# Altium PCB CPU_PCB1.PcbDoc
Units mil, origin at the board's own origin, x right, y up, seen from the top; angles counter-clockwise.
Board outline 1980 x 1520 mil, 2 copper layers (Top Layer, Bottom Layer); 13 components, 48 nets, 113 pads, 0 vias.
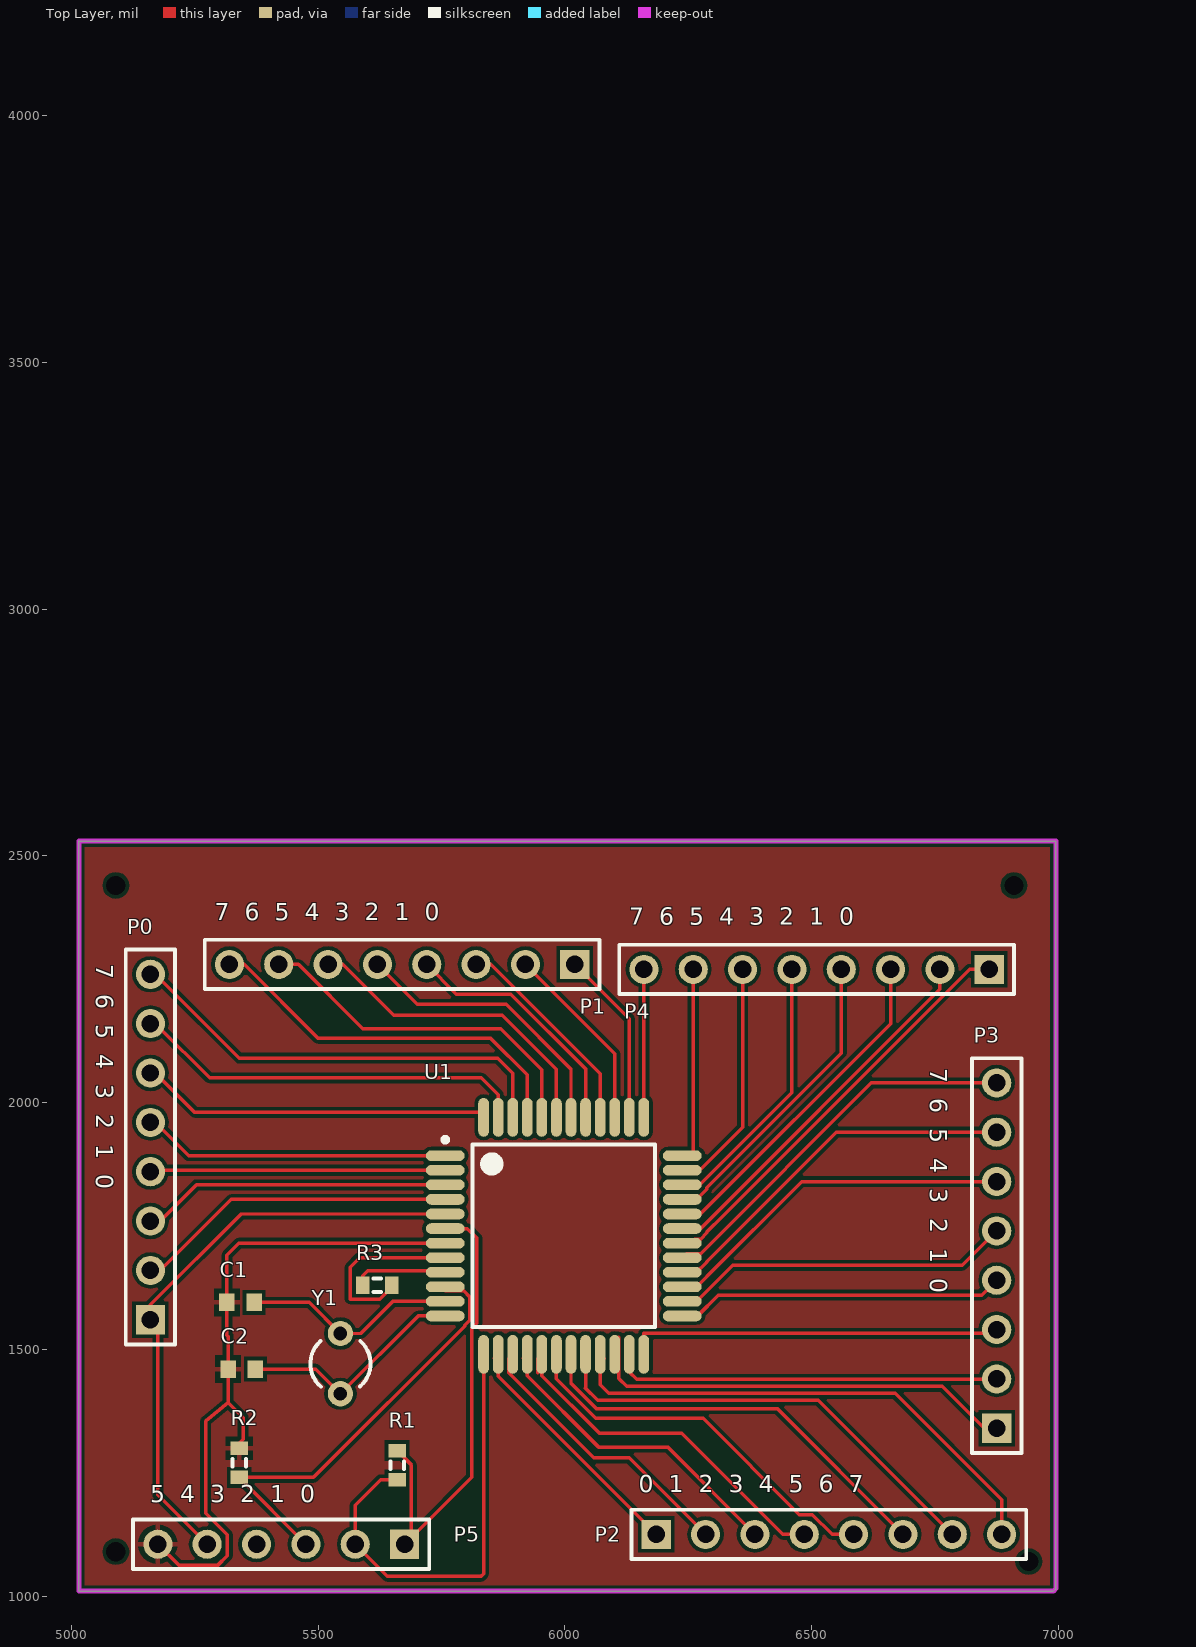
[diagram p0: Top Layer view]
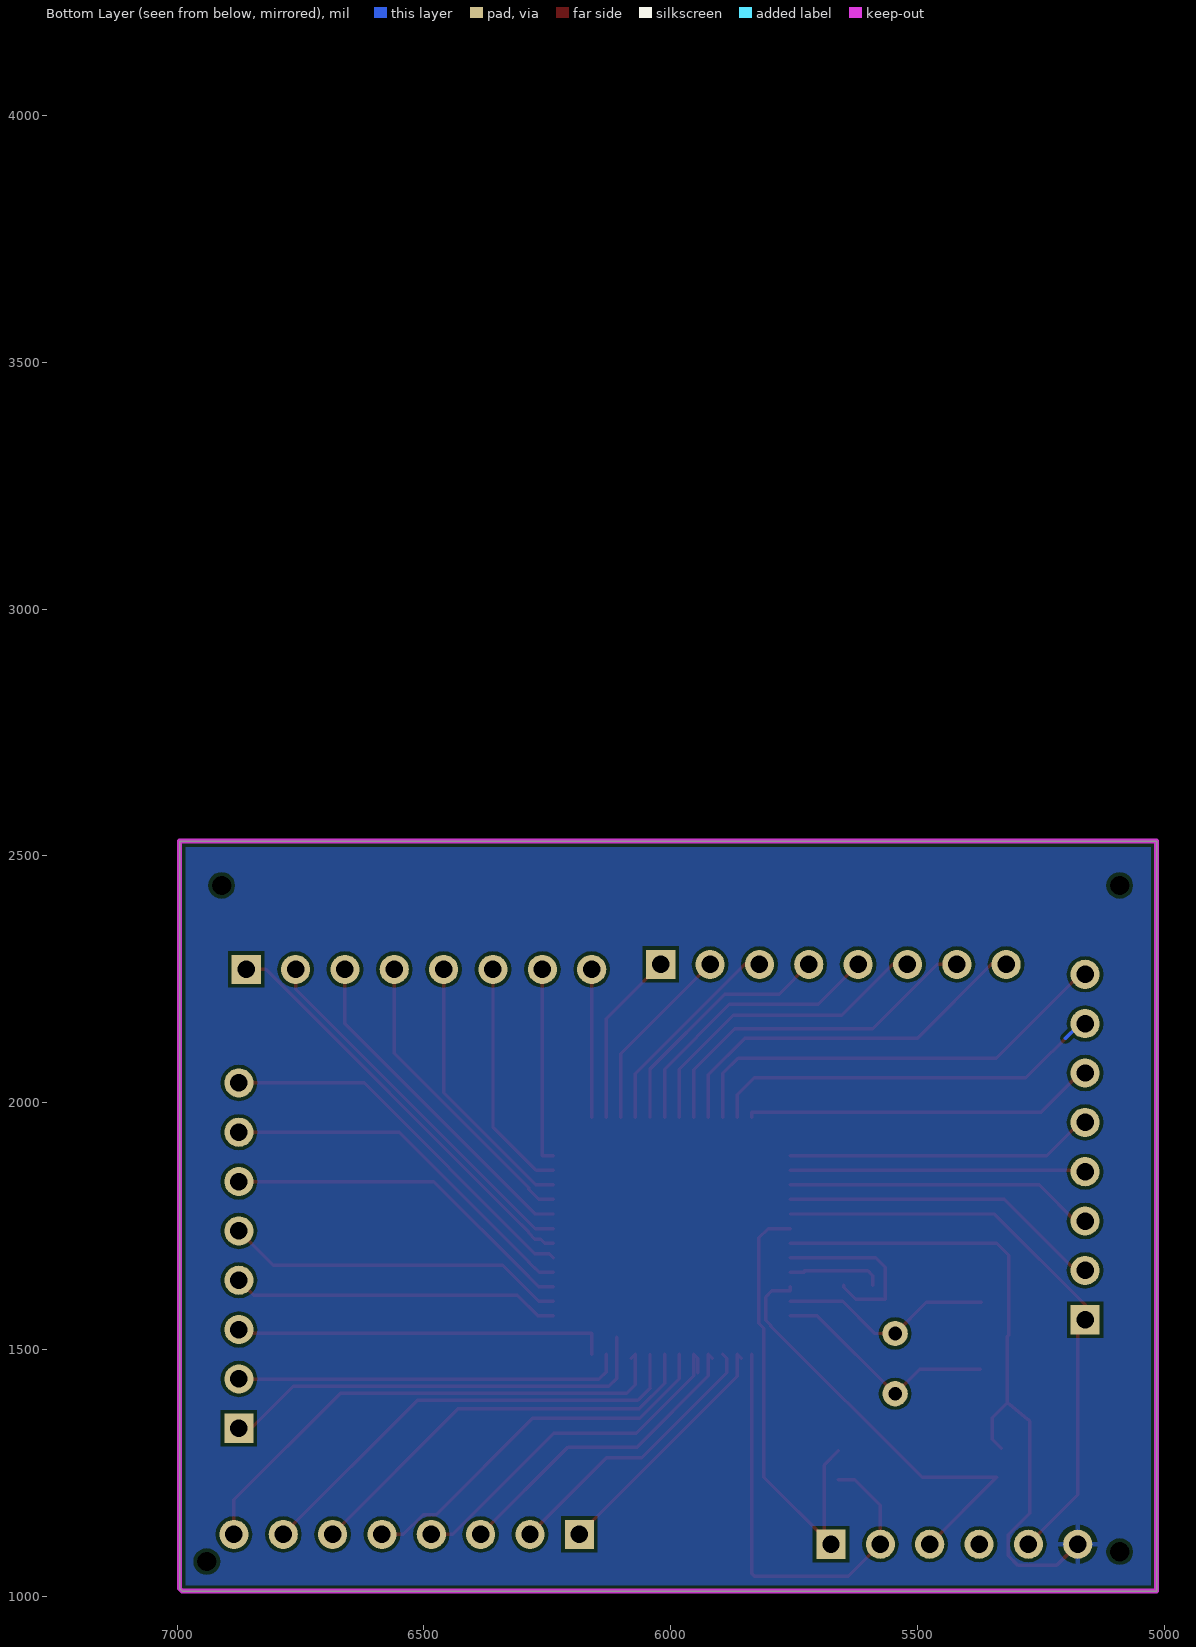
[diagram p1: Bottom Layer view, seen from below]

## Layer stack, top to bottom
Top Solder: solder mask 0.4, Solder Resist, Dk 3.5
Top Layer: signal copper 1.4
Dielectric 1: dielectric 12.6, FR-4, Dk 4.8
Bottom Layer: signal copper 1.4
Bottom Solder: solder mask 0.4, Solder Resist, Dk 3.5

## Board outline
5015,1010 5015,2530 6995,2530 6995,1015 6990,1010

## Design rules (kind name [scope] priority, off if disabled: settings)
Clearance [All] p1: gap=7
PolygonConnect [All] p1: connectstyle=Relief reliefconductorwidth=10 reliefentries=4 polygonreliefangle="90 Angle" airgapwidth=10
RoutingVias [All] p1: holewidth=7.87 width=19.68 viastyle="Through Hole" minholewidth=7.87 minwidth=19.68 maxholewidth=7.87 maxwidth=19.68
SolderMaskExpansion [All] p1: expansion=4
Width [All] p1: maxlimit=20 minlimit=6 preferedwidth=7
30 further rules are at their usual default settings.

## Components (designator, comment, footprint, x,y, rotation, side; value= is the part's Value field where it differs from the comment)
C1 "Cap Semi" 1608[0603] 5342.56,1595 r0 top
C2 "Cap Semi" 1608[0603] 5345,1460 r0 top
P0 "Header 8" HDR1X8 5160,1560 r90 top
P1 "Header 8" HDR1X8 6020,2280 r180 top
P2 "Header 8" HDR1X8 6185,1125 r0 top
P3 "Header 8" HDR1X8 6875,1340 r90 top
P4 "Header 8" HDR1X8 6860,2270 r180 top
P5 "Header 6" HDR1X6 5675,1105 r180 top
R1 "Res3" J1-0603 5660,1265 r90 top
R2 "Res3" J1-0603 5340,1270 r270 top
R3 "Res3" J1-0603 5619.53,1630 r0 top
U1 "S3F8S19" QFP75P1335X1335X230-48N 5997.56,1730 r0 top
Y1 "XTAL" R38 5545,1471.02 r0 top

## Footprints (in the part's own frame and the unit in brackets; to place one, negate y for a bottom-side part, rotate by r counter-clockwise, add the part's x,y. Pads: shape width x height; smd on the part's side, far side on the other; paste and mask are expansions set on the pad)
1608[0603] [mm] "Chip Capacitor, Body 1.6x0.8mm, IPC High Density"
  rect 0.8x0.9 smd: 1(-0.7,0) 2(0.7,0)
  body extent -0.87,-0.48 0.87,0.48, height 1.3
HDR1X6 [mm] "Connector; Header; 6 Position"
  rect 1.5x1.5 hole 0.9: 1(0,0)
  round 1.5 hole 0.9: 2(2.54,0) 3(5.08,0) 4(7.62,0) 5(10.16,0) 6(12.7,0)
  silkscreen extent -1.27,-1.27 13.97,1.27
HDR1X8 [mm] "Connector; Header; 8 Position"
  rect 1.5x1.5 hole 0.9: 1(0,0)
  round 1.5 hole 0.9: 2(2.54,0) 3(5.08,0) 4(7.62,0) 5(10.16,0) 6(12.7,0) 7(15.24,0) 8(17.78,0)
  silkscreen extent -1.27,-1.27 19.05,1.27
J1-0603 [mm] "Chip Resistor, Body 1.6x0.8mm, IPC High Density"
  rect 0.7x0.9 smd: 1(-0.75,0) 2(0.75,0)
  silkscreen extent -0.2,-0.35 0.2,0.35, body extent -0.85,-0.48 0.85,0.48, height 0.9
QFP75P1335X1335X230-48N [mm] "QFP, 48-Leads, Body 10.00x10.00mm, Pitch 0.75mm, IPC Medium Density"
  oval 2x0.55 smd: 1(-6.1,4.125) 2(-6.1,3.375) 3(-6.1,2.625) 4(-6.1,1.875) 5(-6.1,1.125) 6(-6.1,0.375) 7(-6.1,-0.375) 8(-6.1,-1.125) 9(-6.1,-1.875) 10(-6.1,-2.625) 11(-6.1,-3.375) 12(-6.1,-4.125) 25(6.1,-4.125) 26(6.1,-3.375) 27(6.1,-2.625) 28(6.1,-1.875) 29(6.1,-1.125) 30(6.1,-0.375) 31(6.1,0.375) 32(6.1,1.125) 33(6.1,1.875) 34(6.1,2.625) 35(6.1,3.375) 36(6.1,4.125)
  oval 0.55x2 smd: 13(-4.125,-6.1) 14(-3.375,-6.1) 15(-2.625,-6.1) 16(-1.875,-6.1) 17(-1.125,-6.1) 18(-0.375,-6.1) 19(0.375,-6.1) 20(1.125,-6.1) 21(1.875,-6.1) 22(2.625,-6.1) 23(3.375,-6.1) 24(4.125,-6.1) 37(4.125,6.1) 38(3.375,6.1) 39(2.625,6.1) 40(1.875,6.1) 41(1.125,6.1) 42(0.375,6.1) 43(-0.375,6.1) 44(-1.125,6.1) 45(-1.875,6.1) 46(-2.625,6.1) 47(-3.375,6.1) 48(-4.125,6.1)
  silkscreen extent -6.22,-4.7 4.7,5.07, body extent -5,-5 5,5, height 2.3
R38 [mm] "Crystal, Thru-Hole; 2 Leads; Body 3.1 x 8.2 mm (Dia.xH)"
  round 1.3 hole 0.7: 1(0,1.55) 2(0,-1.55)
  silkscreen extent -1.55,-1.19 1.55,1.17

## Part data
C1 C2: "Capacitor (Semiconductor SIM Model)"
P0 P1 P2 P3 P4: "Header, 8-Pin"
P5: "Header, 6-Pin"
R1 R2 R3: "Resistor"
Y1: "Crystal Oscillator"

## Free pads (board coordinates)
  round 0 hole 59.06: 1(5070,3210) 1(6740,3800)
  round 0 hole 39.37: 1(5090,1090) 1(5090,2440) 1(6910,2440) 1(6940,1070)
  round 0 hole 98.43: 1(7150,4070)

## Nets (pads, with @x,y where several pads share a name; then routed paths per layer and width w, separated by ;. In a path a pad name is that pad's centre, name@x,y a point inside that pad or via, vN(x,y) a via of type N, cw(c..) or ccw(c..) an arc to the next point about the centre after c; other vN are vias at no path point)
BUZZER: P0.1 P5.5 U1.5 | length 1195.2
  Top Layer w7: P0.1 5160,1590 5344.29,1774.29 U1.5 ; P0.1@5175,1555 5175,1205 P5.5
GND: C1.1 C2.1 P5.6 R2.1 U1.7 | length 1381.8
  Top Layer w7: P5.6 5218,1062 5296,1062 5316,1082 5316,1124 5272,1168 5272,1354.56 5317.44,1392 ; R2.1@5330,1299.53 5348,1317.53 5348,1361.44 5317.44,1392 ; U1.7 5339.24,1715.24 5315,1691 C1.1 5315,1528.44 5317.44,1526 C2.1 5317.44,1392
NetP0_6: P0.6 U1.48 | length 701.1
  Top Layer w7: P0.6@5175,2055 5250,1980 5835.16,1980 U1.48
NetP0_7: P0.7 U1.47 | length 828.5
  Top Layer w7: P0.7@5175,2155 5280,2050 5830.69,2050 5864.69,2016 U1.47
  Bottom Layer w7: P0.7@5175,2155 5200,2130
NetP0_8: P0.8 U1.46 | length 889.4
  Top Layer w7: P0.8@5175,2255 5340,2090 5863.47,2090 5894.21,2059.26 U1.46
NetP1_1: P1.1 U1.38 | length 355.6
  Top Layer w7: P1.1 6130.43,2169.57 U1.38
NetP1_2: P1.2 U1.39 | length 384.8
  Top Layer w7: P1.2 6100.91,2099.09 U1.39
NetP1_3: P1.3 U1.40 | length 431.5
  Top Layer w7: P1.3 5850,2280 6071.38,2058.62 U1.40
NetP1_4: P1.4 U1.41 | length 507.6
  Top Layer w7: P1.4 5780,2220 5890,2220 6041.85,2068.15 U1.41
NetP1_5: P1.5 U1.42 | length 577.8
  Top Layer w7: P1.5 5701,2199 5881,2199 6012.32,2067.68 U1.42
NetP1_6: P1.6 U1.43 | length 648
  Top Layer w7: P1.6 5550,2280 5653,2177 5873,2177 5982.8,2067.2 U1.43
NetP1_7: P1.7 U1.44 | length 718.2
  Top Layer w7: P1.7 5460,2280 5590,2150 5870,2150 5953.27,2066.73 U1.44
NetP1_8: P1.8 U1.45 | length 782.5
  Top Layer w7: P1.8 5350,2280 5500,2130 5850,2130 5923.74,2056.26 U1.45
NetP2_1: P2.1 U1.14 | length 509.1
  Top Layer w7: U1.14@5856.48,1481.64 U1.14 5864.69,1445.31 P2.1
NetP2_2: P2.2 U1.15 | length 575.4
  Top Layer w7: U1.15 5886.01,1481.64 5886.01,1452.46 6058.48,1280 6130,1280 P2.2
NetP2_3: P2.3 U1.16 | length 649.5
  Top Layer w7: U1.16@5915.54,1481.64 U1.16 5923.74,1446.26 6068,1302 6208,1302 P2.3
NetP2_4: P2.4 U1.17 | length 748.9
  Top Layer w7: 5945.07,1452.46 5945.07,1481.64 U1.17 5953.27,1446.73 6070,1330 6236.61,1330 6441.61,1125 P2.4
NetP2_5: P2.5 U1.18 | length 782.5
  Top Layer w7: U1.18 5982.8,1440 6062.8,1360 6280,1360 6474.97,1165.03 6501.58,1165.03 6541.61,1125 P2.5
NetP2_6: P2.6 U1.19 | length 858.3
  Top Layer w7: U1.19 6012.32,1431 6063.32,1380 6430,1380 P2.6
NetP2_7: P2.7 U1.20 | length 934.7
  Top Layer w7: U1.20 6041.85,1421.85 6041.56,1421.56 6066.12,1397 6513,1397 P2.7
NetP2_8: P2.8 U1.21 | length 1053.2
  Top Layer w7: U1.21@6079.58,1481.64 U1.21 6071.38,1428.62 6089,1411 6669,1411 6885,1195 P2.8
NetP3_4: P3.4 U1.25 | length 667.3
  Top Layer w7: U1.25 6268.6,1567.6 6311,1610 6845,1610 P3.4
NetP3_5: P3.5 U1.26 | length 696.5
  Top Layer w7: U1.26 6267.13,1597.13 6340,1670 6805,1670 P3.5
NetP3_6: P3.6 U1.27 | length 725.8
  Top Layer w7: U1.27 6266.89,1626.65 6287.59,1647.35 6287.59,1647.59 6480,1840 P3.6
NetP3_7: P3.7 U1.28 | length 755.3
  Top Layer w7: U1.28 6266.18,1656.18 6274.38,1664.38 6275.09,1664.38 6287.59,1676.87 6287.59,1677.59 6550,1940 P3.7
NetP3_8: P3.8 U1.29 | length 784
  Top Layer w7: U1.29 6245.92,1693.91 6275.09,1693.91 6621.18,2040 P3.8
NetP4_1: P4.1 U1.30 | length 853.2
  Top Layer w7: U1.30 6255.24,1715.24 6263.44,1723.44 6275.09,1723.44 6287.59,1735.93 6287.59,1737.79 6320.76,1770.96 6320.96,1770.96 6820,2270 P4.1
NetP4_2: P4.2 U1.31 | length 763.3
  Top Layer w7: U1.31 6274.76,1744.76 6760,2230 P4.2
NetP4_3: P4.3 U1.32 | length 692
  Top Layer w7: U1.32 6274.29,1774.29 6660,2160 P4.3
NetP4_4: P4.4 U1.33 | length 616.8
  Top Layer w7: U1.33 6266.89,1803.82 6287.59,1824.51 6287.59,1827.59 6560,2100 P4.4
NetP4_5: P4.5 U1.34 | length 549.6
  Top Layer w7: U1.34 6273.35,1833.35 6460,2020 P4.5
NetP4_6: P4.6 U1.35 | length 478.4
  Top Layer w7: U1.35 6272.87,1862.87 6360,1950 P4.6
NetP4_7: P4.7 U1.36 | length 399.9
  Top Layer w7: U1.36 6260,1892.4 P4.7
NetP4_8: P4.8 U1.37 | length 299.9
  Top Layer w7: U1.37 6159.96,2120 6160,2120.04 P4.8
NetR3_1: R3.1 U1.9 | length 193.4
  Top Layer w7: R3.1 5590,1649 5600,1659 5729,1659 5729,1656.18 U1.9
NetR3_2: R3.2 U1.8 | length 363.3
  Top Layer w7: R3.2 5649.06,1626 5624.84,1601.78 5565,1601.78 5565,1666.71 5584,1685.71 U1.8
NRESET: P5.2 R1.1 U1.13 | length 919.2
  Top Layer w7: R1.1 5626.47,1235.47 5575,1184 P5.2 5640,1040 5830,1040 5835.16,1045.16 U1.13
P0_2: P0.3 U1.3 | length 614.9
  Top Layer w7: P0.3@5175,1755 5253.35,1833.35 U1.3
P0_3: P0.4 U1.2 | length 585.7
  Top Layer w7: P0.4@5175,1855 5182.87,1862.87 U1.2
P0_4: P0.5 U1.1 | length 608.3
  Top Layer w7: P0.5@5175,1955 5237.6,1892.4 U1.1
P3_0: P3.1 U1.22 | length 891.7
  Top Layer w7: U1.22@6109.11,1524.89 6109.11,1440.89 6125,1425 6765,1425 6850,1340 P3.1
P3_1: P3.2 U1.23 | length 787.1
  Top Layer w7: U1.23 6130.43,1453.97 6145.4,1439 6874,1439 P3.2
P3_2: P3.3 U1.24 | length 760.7
  Top Layer w7: U1.24 6159.96,1532.27 6867.27,1532.27 P3.3
SDAT: P0.2 U1.4 | length 644
  Top Layer w7: P0.2@5175,1655 5323.82,1803.82 U1.4
VDD: P5.1 R1.2 U1.6 | length 968.6
  Top Layer w7: R1.2 5689,1265.53 5689,1120 5675,1120 P5.1 5811,1241 5811,1542.69 5821.27,1552.97 5821.27,1725.73 5802.24,1744.76 U1.6
VPP: P5.3 R2.2 U1.10 | length 902.5
  Top Layer w7: P5.3 5339.53,1240.47 R2.2 5490.47,1240.47 5797,1547 5797,1548.49 5807.27,1558.76 5807.27,1605.96 5794.78,1618.45 5757.4,1618.45 U1.10
XIN: C1.2 U1.11 Y1.1 | length 440.3
  Top Layer w7: C1.2 5482.05,1595 Y1.1 5586.43,1532.05 5651.51,1597.13 U1.11
XOUT: C2.2 U1.12 Y1.2 | length 470.8
  Top Layer w7: C2.2 5495,1460 Y1.2 5702.6,1567.6 U1.12
pads on no net: P5.4

## Polygon pours and split planes (outlines as drawn)
GND on Top Layer "GND_L01_P000" (solid, remove dead copper, pour order 0): 5015,1010 5015,2530 6995,2530 6995,1015 6990,1010
GND on Bottom Layer "GND_L02_P001" (solid, remove dead copper, pour order 1): 5015,1010 5015,2530 6995,2530 6995,1015 6990,1010

## Keep-outs
Keep-Out Layer:
  the board outline again, w10

## Silkscreen, mask and mechanical layers (free items; w line width, h text height)
Top Overlay:
  text "7  6  5  4  3  2  1  0" at 5290,2370 h35
  text "7  6  5  4  3  2  1  0" at 6130,2360 h35
  text "7  6  5  4  3  2  1  0" at 5050,2280 h35 r270
  text "7  6  5  4  3  2  1  0" at 6740,2070 h35 r270
  text "0  1  2  3  4  5  6  7" at 6150,1210 h35
  text "5  4  3  2  1  0" at 5160,1190 h35